# Altium PCB AX301_AX4010.PcbDoc (part 2 of 10)
Units mm, origin at the board's own origin, x right, y up, seen from the top; angles counter-clockwise.
Board outline 131.7 x 91.8 mm, 4 copper layers (Top Layer, GND, Mid-Layer 1, Bottom Layer); 191 components, 338 nets, 1108 pads, 420 vias.
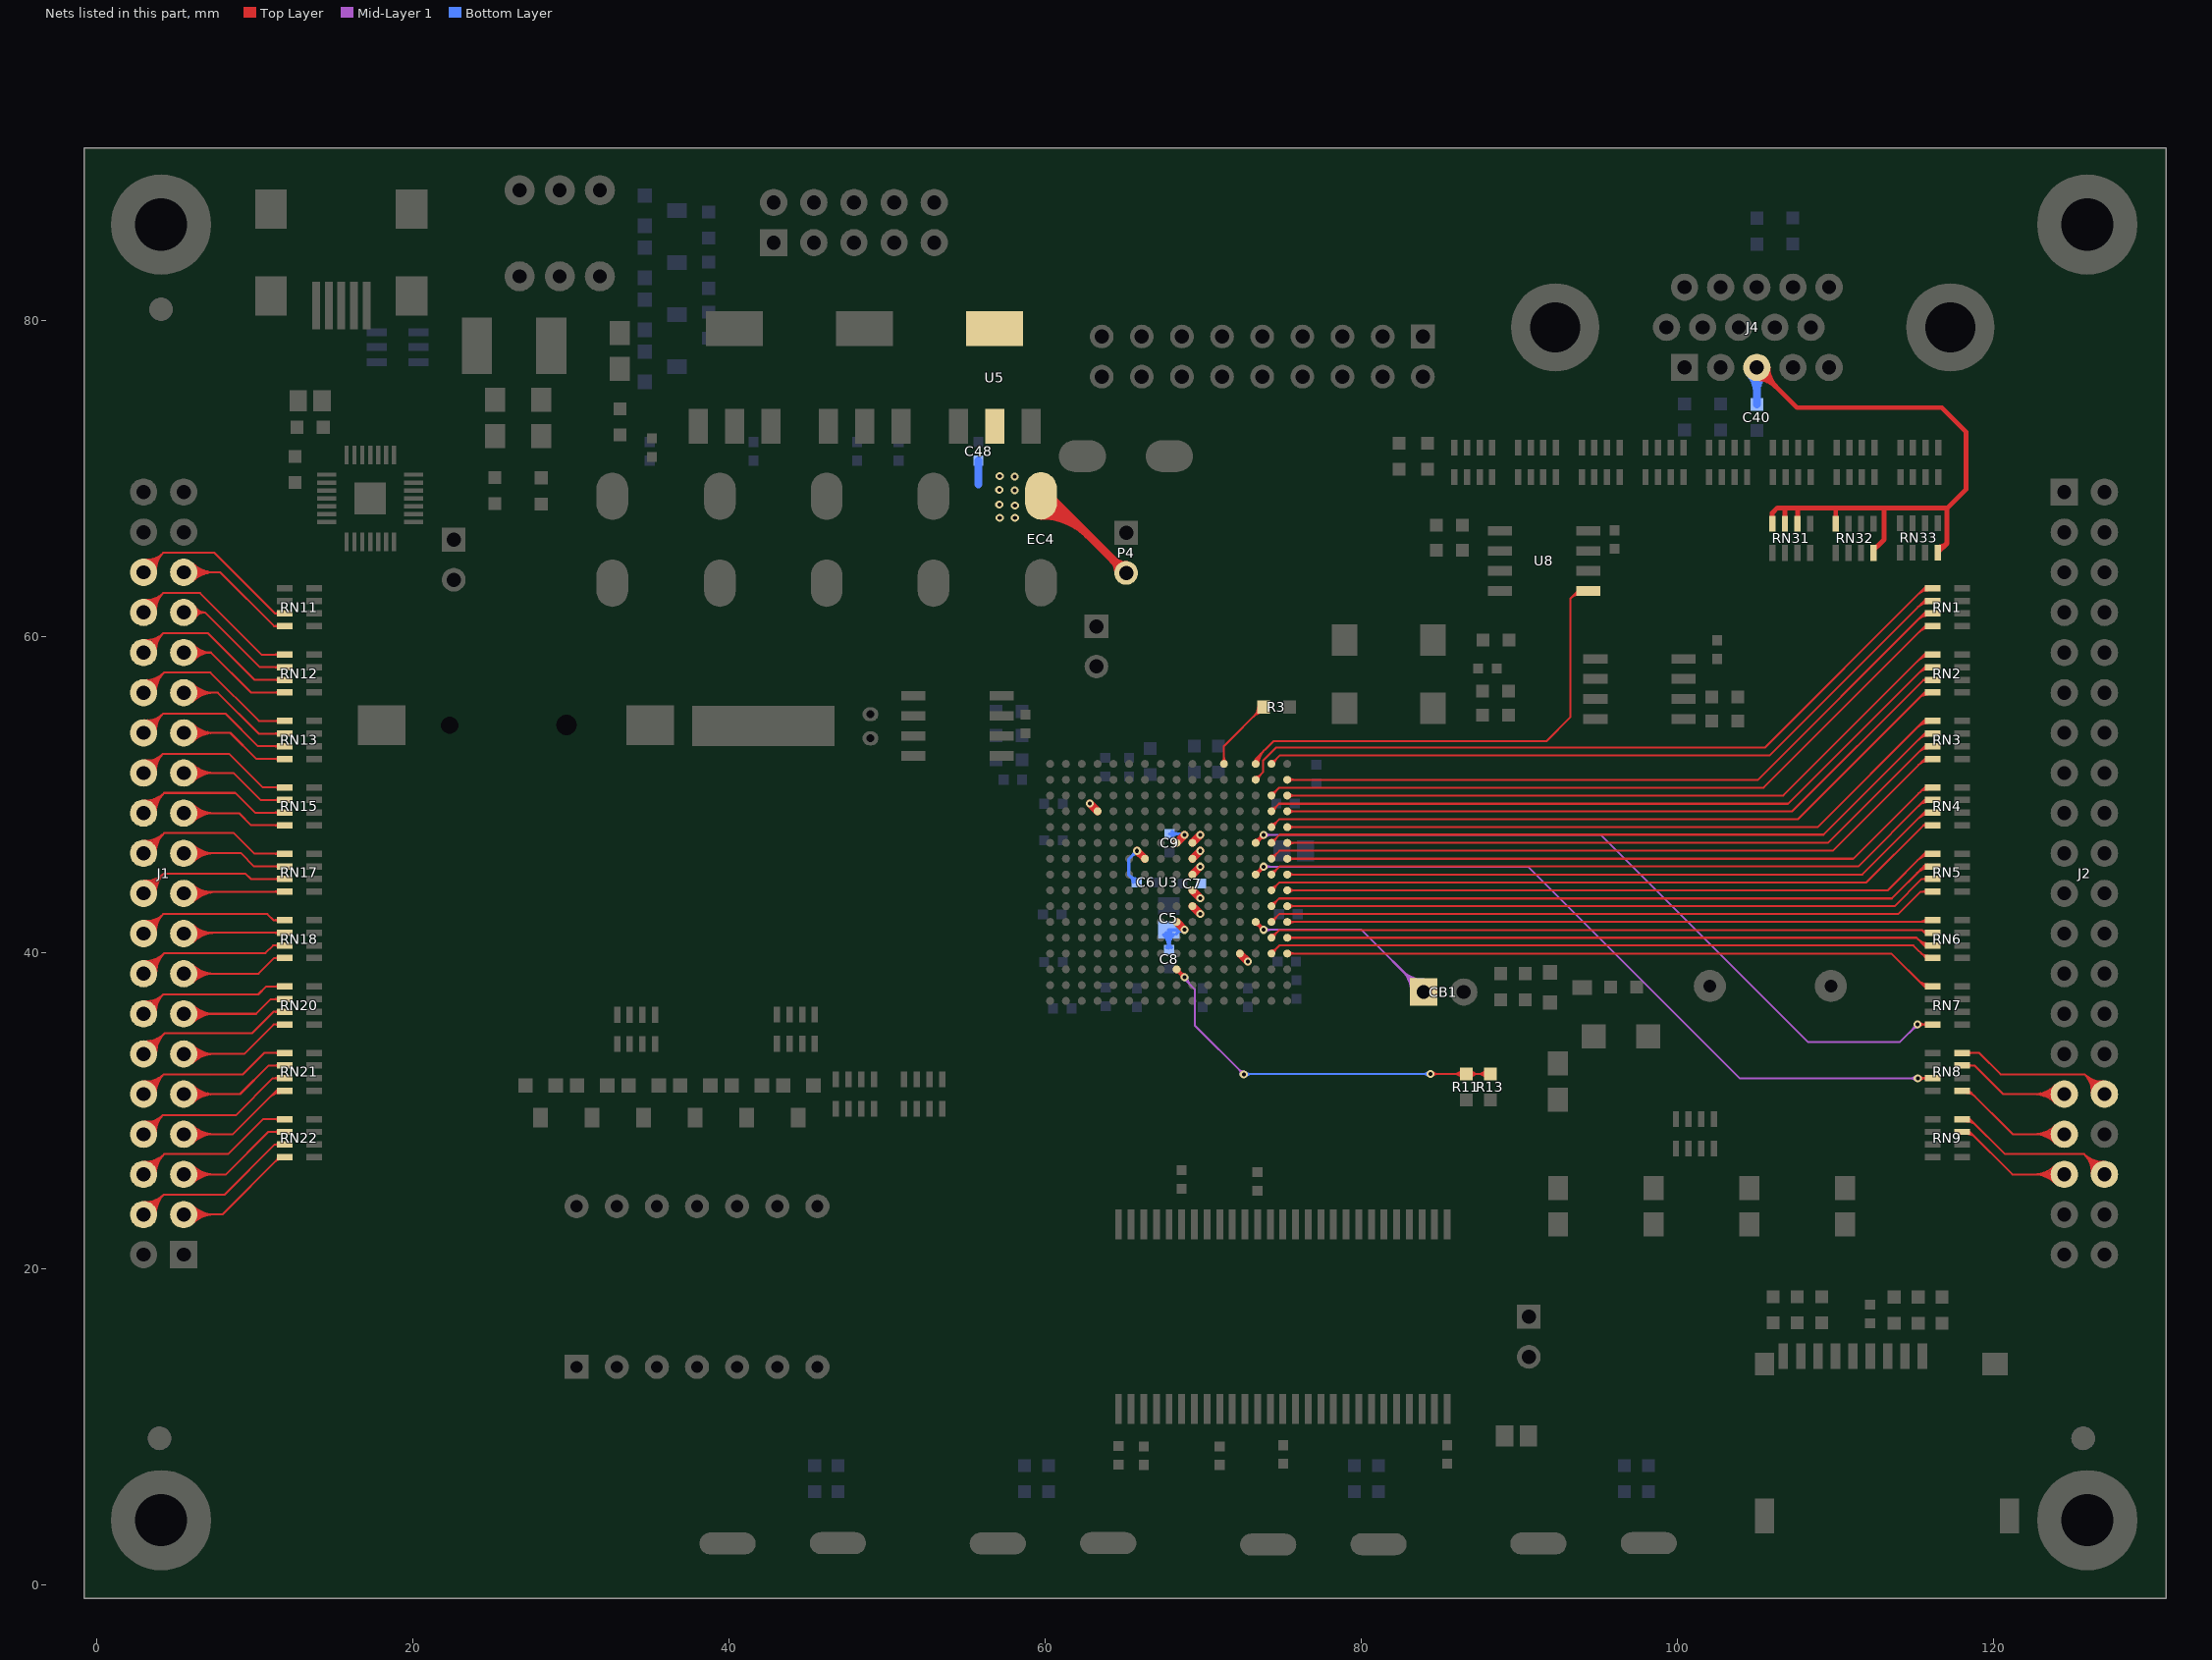
[diagram p4: the nets of this part, all layers, seen from the top]

## Via types
v1: diameter 0.508, hole 0.254, Top Layer to Bottom Layer, 377 vias
v2: diameter 0.762, hole 0.381, Top Layer to Bottom Layer, 41 vias
v3: diameter 1.016, hole 0.508, Top Layer to Bottom Layer, 2 vias

## Nets (pads, with @x,y where several pads share a name; then routed paths per layer and width w, separated by ;. In a path a pad name is that pad's centre, name@x,y a point inside that pad or via, vN(x,y) a via of type N, cw(c..) or ccw(c..) an arc to the next point about the centre after c; other vN are vias at no path point) (continued)
_D8: J2.33 RN8.5 | length 17.7
  Top Layer w0.127: RN8.5@118.012,31.239 118.468,31.239 121.218,28.49 J2.33@124.485,28.49 ; RN8.5@118.312,31.103 cw(c118.312,30.396) 118.812,30.896 ; RN8.5@118.312,31.23 cw(c118.312,30.829) 118.595,31.112 ; J2.33@123.92,27.924 ccw(c122.554,26.558) 122.554,28.49 ccw(c122.554,30.422) J2.33@123.92,29.056 ; J2.33@124.009,28.014 ccw(c122.86,26.865) 122.86,28.49 ccw(c122.86,30.115) J2.33@124.009,28.966 ; J2.33@124.099,28.104 ccw(c123.167,27.172) 123.167,28.49 ccw(c123.167,29.808) J2.33@124.099,28.876 ; J2.33@124.189,28.194 ccw(c123.474,27.478) 123.474,28.49 ccw(c123.474,29.502) J2.33@124.189,28.786
_E7: J2.32 RN8.8 | length 18.7
  Top Layer w0.127: RN8.8@118.012,33.639 119.091,33.639 120.447,32.283 125.772,32.283 ; RN8.8@118.409,33.543 cw(c118.642,33.31) 118.642,33.639 cw(c118.642,33.969) RN8.8@118.409,33.736 ; J2.32@126.227,31.08 ccw(c124.667,31.178) 125.772,32.283 ; J2.32@126.354,31.072 ccw(c125.041,31.154) 125.971,32.084 ccw(c126.901,33.014) J2.32@126.983,31.702 ; J2.32@126.48,31.064 ccw(c125.415,31.131) 126.17,31.885 ccw(c126.924,32.64) J2.32@126.991,31.575 ; J2.32@126.607,31.056 ccw(c125.79,31.107) 126.369,31.687 ccw(c126.948,32.266) J2.32@126.999,31.448 ; J2.32@126.975,31.829 cw(c126.877,33.389) 125.772,32.283 ; J2.32@127.025,31.03 125.772,32.283
_E8: J2.36 RN9.8 | length 20.1
  Top Layer w0.127: RN9.8@118.012,29.439 118.516,29.439 ; RN9.8@118.312,29.302 cw(c118.312,28.48) 118.894,29.061 ; RN9.8@118.312,29.429 cw(c118.312,28.913) 118.677,29.278 ; RN9.8@118.438,29.386 cw(c118.516,29.354) 118.516,29.439 ; RN9.8@118.438,29.491 ccw(c118.516,29.523) 118.516,29.439 ; J2.36@126.226,25.988 ccw(c124.584,26.066) 125.747,27.229 ; J2.36@126.353,25.982 ccw(c124.972,26.048) 125.95,27.026 ccw(c126.927,28.004) J2.36@126.993,26.622 ; J2.36@126.48,25.976 ccw(c125.359,26.03) 126.153,26.823 ccw(c126.946,27.616) J2.36@126.999,26.495 ; J2.36@126.607,25.97 ccw(c125.747,26.011) 126.356,26.62 ccw(c126.964,27.229) J2.36@127.005,26.369 ; J2.36@126.987,26.749 cw(c126.909,28.391) 125.747,27.229 ; J2.36@127.025,25.95 125.747,27.229 ; 118.516,29.439 120.726,27.229 125.747,27.229
_E9: J2.35 RN9.7 | length 17.8
  Top Layer w0.127: RN9.7@118.012,28.639 118.504,28.639 121.192,25.95 J2.35@124.485,25.95 ; RN9.7@118.312,28.502 cw(c118.312,27.711) 118.872,28.27 ; RN9.7@118.312,28.629 cw(c118.312,28.144) 118.655,28.487 ; J2.35@123.92,25.384 ccw(c122.554,24.018) 122.554,25.95 ccw(c122.554,27.882) J2.35@123.92,26.516 ; J2.35@124.009,25.474 ccw(c122.86,24.325) 122.86,25.95 ccw(c122.86,27.575) J2.35@124.009,26.426 ; J2.35@124.099,25.564 ccw(c123.167,24.632) 123.167,25.95 ccw(c123.167,27.268) J2.35@124.099,26.336 ; J2.35@124.189,25.654 ccw(c123.474,24.938) 123.474,25.95 ccw(c123.474,26.962) J2.35@124.189,26.246
_F8: J2.31 RN8.7 | length 17
  Top Layer w0.127: RN8.7@118.012,32.839 118.799,32.839 120.608,31.03 J2.31@124.485,31.03 ; RN8.7@118.409,32.743 cw(c118.642,32.51) 118.642,32.839 cw(c118.642,33.169) RN8.7@118.409,32.936 ; J2.31@123.92,30.464 ccw(c122.554,29.098) 122.554,31.03 ccw(c122.554,32.962) J2.31@123.92,31.596 ; J2.31@124.009,30.554 ccw(c122.86,29.405) 122.86,31.03 ccw(c122.86,32.655) J2.31@124.009,31.506 ; J2.31@124.099,30.644 ccw(c123.167,29.712) 123.167,31.03 ccw(c123.167,32.348) J2.31@124.099,31.416 ; J2.31@124.189,30.734 ccw(c123.474,30.018) 123.474,31.03 ccw(c123.474,32.042) J2.31@124.189,31.326
_K9: J1.31 RN12.4 | length 15.7
  Top Layer w0.127: J1.31@5.512,58.97 7.222,58.97 ; J1.31@5.815,58.699 cw(c6.4,58.203) 6.4,58.97 cw(c6.4,59.737) J1.31@5.815,59.241 ; J1.31@5.912,58.617 cw(c6.674,57.971) 6.674,58.97 cw(c6.674,59.969) J1.31@5.912,59.323 ; J1.31@6.009,58.535 cw(c6.948,57.738) 6.948,58.97 cw(c6.948,60.202) J1.31@6.009,59.405 ; J1.31@6.106,59.487 ccw(c7.222,60.434) 7.222,58.97 ; J1.31@6.106,58.453 cw(c7.222,57.506) 7.222,58.97 ; RN12.4@11.491,56.346 ccw(c11.258,56.113) 11.258,56.442 ccw(c11.258,56.772) RN12.4@11.491,56.539 ; RN12.4@11.887,56.442 9.75,56.442 7.222,58.97
_L9: J1.30 RN13.1 | length 19.7
  Top Layer w0.127: J1.30@2.972,56.43 4.251,57.709 ; J1.30@2.978,56.848 ccw(c3.025,57.726) 3.647,57.105 ; J1.30@2.985,56.975 ccw(c3.045,58.109) 3.848,57.306 ; J1.30@2.991,57.102 ccw(c3.066,58.491) 4.049,57.507 ; J1.30@2.998,57.229 ccw(c3.086,58.873) 4.251,57.709 ; J1.30@3.374,56.443 cw(c4.244,56.471) 3.629,57.087 ; J1.30@3.501,56.448 cw(c4.646,56.484) 3.836,57.294 ; J1.30@3.628,56.452 cw(c5.047,56.497) 4.043,57.501 ; J1.30@3.755,56.456 cw(c5.449,56.51) 4.251,57.709 ; RN13.1@11.491,54.545 ccw(c11.258,54.312) 11.258,54.642 ccw(c11.258,54.971) RN13.1@11.491,54.738 ; RN13.1@11.887,54.642 10.255,54.642 7.188,57.709 4.251,57.709
_L10: J1.29 RN13.2 | length 17.2
  Top Layer w0.127: J1.29@5.512,56.43 7.654,56.43 10.242,53.842 RN13.2@11.887,53.842 ; J1.29@5.792,56.134 cw(c6.507,55.418) 6.507,56.43 cw(c6.507,57.442) J1.29@5.792,56.726 ; J1.29@5.881,56.044 cw(c6.814,55.112) 6.814,56.43 cw(c6.814,57.748) J1.29@5.881,56.816 ; J1.29@5.971,55.954 cw(c7.12,54.805) 7.12,56.43 cw(c7.12,58.055) J1.29@5.971,56.906 ; J1.29@6.061,55.864 cw(c7.427,54.498) 7.427,56.43 cw(c7.427,58.362) J1.29@6.061,56.996 ; RN13.2@11.491,53.745 ccw(c11.258,53.512) 11.258,53.842 ccw(c11.258,54.171) RN13.2@11.491,53.938
_M9: J1.28 RN13.3 | length 18.7
  Top Layer w0.127: J1.28@2.972,53.89 4.2,55.118 ; J1.28@2.99,54.308 ccw(c3.057,55.1) 3.62,54.538 ; J1.28@3.001,54.434 ccw(c3.087,55.457) 3.813,54.731 ; J1.28@3.012,54.561 ccw(c3.117,55.814) 4.006,54.925 ; J1.28@3.022,54.687 ccw(c3.147,56.17) 4.2,55.118 ; J1.28@3.373,53.916 cw(c4.158,53.964) 3.602,54.52 ; J1.28@3.5,53.924 cw(c4.533,53.988) 3.801,54.72 ; J1.28@3.627,53.932 cw(c4.908,54.011) 4.001,54.919 ; J1.28@3.754,53.939 cw(c5.284,54.034) 4.2,55.118 ; RN13.3@11.491,52.945 ccw(c11.258,52.712) 11.258,53.042 ccw(c11.258,53.371) RN13.3@11.491,53.138 ; RN13.3@11.887,53.042 10.204,53.042 8.128,55.118 4.2,55.118
_N2: J1.36 RN11.3 | length 19.4
  Top Layer w0.127: J1.36@2.972,64.05 4.2,65.278 ; J1.36@2.99,64.468 ccw(c3.057,65.26) 3.62,64.698 ; J1.36@3.001,64.594 ccw(c3.087,65.617) 3.813,64.891 ; J1.36@3.012,64.721 ccw(c3.117,65.974) 4.006,65.085 ; J1.36@3.022,64.847 ccw(c3.147,66.33) 4.2,65.278 ; J1.36@3.373,64.076 cw(c4.158,64.124) 3.602,64.68 ; J1.36@3.5,64.084 cw(c4.533,64.148) 3.801,64.88 ; J1.36@3.627,64.092 cw(c4.908,64.171) 4.001,65.079 ; J1.36@3.754,64.099 cw(c5.284,64.194) 4.2,65.278 ; RN11.3@11.486,61.351 ccw(c11.277,61.16) 11.277,61.443 ; RN11.3@11.486,61.535 cw(c11.277,61.726) 11.277,61.443 ; RN11.3@11.887,61.443 11.277,61.443 ; 4.2,65.278 7.442,65.278 11.277,61.443
_P1: J1.35 RN11.4 | length 17.6
  Top Layer w0.127: J1.35@5.512,64.05 7.807,64.05 11.214,60.643 RN11.4@11.887,60.643 ; J1.35@5.792,63.754 cw(c6.507,63.038) 6.507,64.05 cw(c6.507,65.062) J1.35@5.792,64.346 ; J1.35@5.881,63.664 cw(c6.814,62.732) 6.814,64.05 cw(c6.814,65.368) J1.35@5.881,64.436 ; J1.35@5.971,63.574 cw(c7.12,62.425) 7.12,64.05 cw(c7.12,65.675) J1.35@5.971,64.526 ; J1.35@6.061,63.484 cw(c7.427,62.118) 7.427,64.05 cw(c7.427,65.982) J1.35@6.061,64.616 ; RN11.4@11.491,60.546 ccw(c11.258,60.313) 11.258,60.643 ccw(c11.258,60.972) RN11.4@11.491,60.739
_P2: J1.34 RN12.1 | length 19.5
  Top Layer w0.127: J1.34@2.972,61.51 4.2,62.738 ; J1.34@2.99,61.928 ccw(c3.057,62.72) 3.62,62.158 ; J1.34@3.001,62.054 ccw(c3.087,63.077) 3.813,62.351 ; J1.34@3.012,62.181 ccw(c3.117,63.434) 4.006,62.545 ; J1.34@3.022,62.307 ccw(c3.147,63.79) 4.2,62.738 ; J1.34@3.373,61.536 cw(c4.158,61.584) 3.602,62.14 ; J1.34@3.5,61.544 cw(c4.533,61.608) 3.801,62.34 ; J1.34@3.627,61.552 cw(c4.908,61.631) 4.001,62.539 ; J1.34@3.754,61.559 cw(c5.284,61.654) 4.2,62.738 ; RN12.1@11.491,58.746 ccw(c11.258,58.513) 11.258,58.842 ccw(c11.258,59.172) RN12.1@11.491,58.939 ; RN12.1@11.887,58.842 10.424,58.842 6.528,62.738 4.2,62.738
_P3: J1.26 RN15.1 | length 18.4
  Top Layer w0.127: J1.26@2.972,51.35 4.174,52.553 ; J1.26@2.997,51.767 ccw(c3.072,52.518) 3.606,51.984 ; J1.26@3.01,51.893 ccw(c3.107,52.862) 3.796,52.174 ; J1.26@3.022,52.02 ccw(c3.141,53.207) 3.985,52.363 ; J1.26@3.035,52.146 ccw(c3.176,53.551) 4.174,52.553 ; J1.26@3.373,51.382 cw(c4.116,51.44) 3.589,51.967 ; J1.26@3.5,51.392 cw(c4.478,51.468) 3.784,52.162 ; J1.26@3.626,51.402 cw(c4.84,51.496) 3.979,52.357 ; J1.26@3.753,51.412 cw(c5.202,51.525) 4.174,52.553 ; RN15.1@11.491,50.345 ccw(c11.258,50.112) 11.258,50.441 ccw(c11.258,50.771) RN15.1@11.491,50.538 ; RN15.1@11.887,50.441 10.493,50.441 8.382,52.553 4.174,52.553
_P8: J1.32 RN12.3 | length 19.1
  Top Layer w0.127: J1.32@2.972,58.97 4.2,60.198 ; J1.32@2.99,59.388 ccw(c3.057,60.18) 3.62,59.618 ; J1.32@3.001,59.514 ccw(c3.087,60.537) 3.813,59.811 ; J1.32@3.012,59.641 ccw(c3.117,60.894) 4.006,60.005 ; J1.32@3.022,59.767 ccw(c3.147,61.25) 4.2,60.198 ; J1.32@3.373,58.996 cw(c4.158,59.044) 3.602,59.6 ; J1.32@3.5,59.004 cw(c4.533,59.068) 3.801,59.8 ; J1.32@3.627,59.012 cw(c4.908,59.091) 4.001,59.999 ; J1.32@3.754,59.019 cw(c5.284,59.114) 4.2,60.198 ; RN12.3@11.491,57.146 ccw(c11.258,56.913) 11.258,57.242 ccw(c11.258,57.572) RN12.3@11.491,57.339 ; RN12.3@11.887,57.242 9.992,57.242 7.036,60.198 4.2,60.198
_R1: J1.33 RN12.2 | length 12.3
  Top Layer w0.127: J1.33@5.512,61.51 6.841,61.51 ; J1.33@5.975,61.249 cw(c6.414,61.01) 6.414,61.51 cw(c6.414,62.01) J1.33@5.975,61.771 ; J1.33@6.086,61.188 cw(c6.628,60.894) 6.628,61.51 cw(c6.628,62.126) J1.33@6.086,61.832 ; J1.33@6.198,61.128 cw(c6.841,60.778) 6.841,61.51 ; J1.33@6.198,61.892 ccw(c6.841,62.242) 6.841,61.51 ; RN12.2@11.491,57.946 ccw(c11.258,57.713) 11.258,58.042 ccw(c11.258,58.372) RN12.2@11.491,58.139 ; RN12.2@11.887,58.042 10.309,58.042 6.841,61.51
_R3: J1.24 RN15.3 | length 18.9
  Top Layer w0.127: J1.24@2.972,48.81 4.251,50.089 ; J1.24@2.978,49.228 ccw(c3.025,50.106) 3.647,49.485 ; J1.24@2.985,49.355 ccw(c3.045,50.489) 3.848,49.686 ; J1.24@2.991,49.482 ccw(c3.066,50.871) 4.049,49.887 ; J1.24@2.998,49.609 ccw(c3.086,51.253) 4.251,50.089 ; J1.24@3.374,48.823 cw(c4.244,48.851) 3.629,49.467 ; J1.24@3.501,48.828 cw(c4.646,48.864) 3.836,49.674 ; J1.24@3.628,48.832 cw(c5.047,48.877) 4.043,49.881 ; J1.24@3.755,48.836 cw(c5.449,48.89) 4.251,50.089 ; RN15.3@11.491,48.745 ccw(c11.258,48.512) 11.258,48.841 ccw(c11.258,49.171) RN15.3@11.491,48.938 ; RN15.3@11.887,48.841 10.011,48.841 8.763,50.089 4.251,50.089
_R4: J1.22 RN17.1 | length 18.9
  Top Layer w0.127: J1.22@2.972,46.27 4.251,47.549 ; J1.22@2.978,46.688 ccw(c3.025,47.566) 3.647,46.945 ; J1.22@2.985,46.815 ccw(c3.045,47.949) 3.848,47.146 ; J1.22@2.991,46.942 ccw(c3.066,48.331) 4.049,47.347 ; J1.22@2.998,47.069 ccw(c3.086,48.713) 4.251,47.549 ; J1.22@3.374,46.283 cw(c4.244,46.311) 3.629,46.927 ; J1.22@3.501,46.288 cw(c4.646,46.324) 3.836,47.134 ; J1.22@3.628,46.292 cw(c5.047,46.337) 4.043,47.341 ; J1.22@3.755,46.296 cw(c5.449,46.35) 4.251,47.549 ; RN17.1@11.491,46.144 ccw(c11.258,45.911) 11.258,46.241 ccw(c11.258,46.57) RN17.1@11.491,46.337 ; RN17.1@11.887,46.241 9.97,46.241 8.661,47.549 4.251,47.549
_R5: J1.20 RN17.3 | length 18.3
  Top Layer w0.127: J1.20@2.972,43.73 4.225,44.983 ; J1.20@2.984,44.148 ccw(c3.041,44.983) 3.633,44.391 ; J1.20@2.993,44.275 ccw(c3.067,45.352) 3.83,44.589 ; J1.20@3.001,44.402 ccw(c3.092,45.722) 4.028,44.786 ; J1.20@3.01,44.528 ccw(c3.117,46.091) 4.225,44.983 ; J1.20@3.374,43.75 cw(c4.201,43.788) 3.615,44.374 ; J1.20@3.501,43.755 cw(c4.589,43.806) 3.819,44.577 ; J1.20@3.628,43.761 cw(c4.977,43.825) 4.022,44.78 ; J1.20@3.754,43.767 cw(c5.366,43.843) 4.225,44.983 ; RN17.3@11.491,44.544 ccw(c11.258,44.311) 11.258,44.641 ccw(c11.258,44.97) RN17.3@11.491,44.737 ; RN17.3@11.887,44.641 9.741,44.641 9.398,44.983 4.225,44.983
_R6: J1.18 RN18.1 | length 18
  Top Layer w0.127: J1.18@2.972,41.19 4.2,42.418 ; J1.18@2.99,41.608 ccw(c3.057,42.4) 3.62,41.838 ; J1.18@3.001,41.734 ccw(c3.087,42.757) 3.813,42.031 ; J1.18@3.012,41.861 ccw(c3.117,43.114) 4.006,42.225 ; J1.18@3.022,41.987 ccw(c3.147,43.47) 4.2,42.418 ; J1.18@3.373,41.216 cw(c4.158,41.264) 3.602,41.82 ; J1.18@3.5,41.224 cw(c4.533,41.288) 3.801,42.02 ; J1.18@3.627,41.232 cw(c4.908,41.311) 4.001,42.219 ; J1.18@3.754,41.239 cw(c5.284,41.334) 4.2,42.418 ; RN18.1@11.491,41.944 ccw(c11.258,41.711) 11.258,42.04 ccw(c11.258,42.37) RN18.1@11.491,42.137 ; RN18.1@11.887,42.04 11.173,42.04 10.795,42.418 4.2,42.418
_R7: J1.16 RN18.3 | length 18.9
  Top Layer w0.127: J1.16@2.972,38.65 4.276,39.954 ; J1.16@2.972,39.069 ccw(c3.008,39.99) 3.66,39.338 ; J1.16@2.977,39.196 ccw(c3.023,40.385) 3.865,39.544 ; J1.16@2.982,39.323 ccw(c3.039,40.781) 4.071,39.749 ; J1.16@2.987,39.449 ccw(c3.054,41.176) 4.276,39.954 ; J1.16@3.374,38.657 cw(c4.288,38.674) 3.642,39.32 ; J1.16@3.501,38.66 cw(c4.703,38.681) 3.853,39.531 ; J1.16@3.628,38.662 cw(c5.118,38.689) 4.065,39.743 ; J1.16@3.755,38.664 cw(c5.534,38.696) 4.276,39.954 ; RN18.3@11.491,40.344 ccw(c11.258,40.111) 11.258,40.44 ccw(c11.258,40.77) RN18.3@11.491,40.537 ; RN18.3@11.887,40.44 11.154,40.44 10.668,39.954 4.276,39.954
_R8: J1.14 RN20.1 | length 18.1
  Top Layer w0.127: J1.14@2.972,36.11 4.2,37.338 ; J1.14@2.99,36.528 ccw(c3.057,37.32) 3.62,36.758 ; J1.14@3.001,36.654 ccw(c3.087,37.677) 3.813,36.951 ; J1.14@3.012,36.781 ccw(c3.117,38.034) 4.006,37.145 ; J1.14@3.022,36.907 ccw(c3.147,38.39) 4.2,37.338 ; J1.14@3.373,36.136 cw(c4.158,36.184) 3.602,36.74 ; J1.14@3.5,36.144 cw(c4.533,36.208) 3.801,36.94 ; J1.14@3.627,36.152 cw(c4.908,36.231) 4.001,37.139 ; J1.14@3.754,36.159 cw(c5.284,36.254) 4.2,37.338 ; RN20.1@11.491,37.743 ccw(c11.258,37.51) 11.258,37.84 ccw(c11.258,38.169) RN20.1@11.491,37.936 ; RN20.1@11.887,37.84 10.712,37.84 10.211,37.338 4.2,37.338
_R9: J1.12 RN20.3 | length 19.2
  Top Layer w0.127: J1.12@2.972,33.57 4.276,34.874 ; J1.12@2.972,33.989 ccw(c3.008,34.91) 3.66,34.258 ; J1.12@2.977,34.116 ccw(c3.023,35.305) 3.865,34.464 ; J1.12@2.982,34.243 ccw(c3.039,35.701) 4.071,34.669 ; J1.12@2.987,34.369 ccw(c3.054,36.096) 4.276,34.874 ; J1.12@3.374,33.577 cw(c4.288,33.594) 3.642,34.24 ; J1.12@3.501,33.58 cw(c4.703,33.601) 3.853,34.451 ; J1.12@3.628,33.582 cw(c5.118,33.609) 4.065,34.663 ; J1.12@3.755,33.584 cw(c5.534,33.616) 4.276,34.874 ; RN20.3@11.491,36.143 ccw(c11.258,35.91) 11.258,36.24 ccw(c11.258,36.569) RN20.3@11.491,36.336 ; RN20.3@11.887,36.24 11.17,36.24 9.804,34.874 4.276,34.874
_R10: J1.10 RN21.1 | length 18.7
  Top Layer w0.127: J1.10@2.972,31.03 4.225,32.283 ; J1.10@2.984,31.448 ccw(c3.041,32.283) 3.633,31.691 ; J1.10@2.993,31.575 ccw(c3.067,32.652) 3.83,31.889 ; J1.10@3.001,31.702 ccw(c3.092,33.022) 4.028,32.086 ; J1.10@3.01,31.828 ccw(c3.117,33.391) 4.225,32.283 ; J1.10@3.374,31.05 cw(c4.201,31.088) 3.615,31.674 ; J1.10@3.501,31.055 cw(c4.589,31.106) 3.819,31.877 ; J1.10@3.628,31.061 cw(c4.977,31.125) 4.022,32.08 ; J1.10@3.754,31.067 cw(c5.366,31.143) 4.225,32.283 ; RN21.1@11.491,33.543 ccw(c11.258,33.31) 11.258,33.639 ccw(c11.258,33.969) RN21.1@11.491,33.736 ; RN21.1@11.887,33.639 10.601,33.639 9.246,32.283 4.225,32.283
_R11: J1.8 RN21.3 | length 18.5
  Top Layer w0.127: J1.8@2.972,28.49 4.174,29.693 ; J1.8@2.997,28.907 ccw(c3.072,29.658) 3.606,29.124 ; J1.8@3.01,29.033 ccw(c3.107,30.002) 3.796,29.314 ; J1.8@3.022,29.16 ccw(c3.141,30.347) 3.985,29.503 ; J1.8@3.035,29.286 ccw(c3.176,30.691) 4.174,29.693 ; J1.8@3.373,28.522 cw(c4.116,28.58) 3.589,29.107 ; J1.8@3.5,28.532 cw(c4.478,28.608) 3.784,29.302 ; J1.8@3.626,28.542 cw(c4.84,28.636) 3.979,29.497 ; J1.8@3.753,28.552 cw(c5.202,28.665) 4.174,29.693 ; RN21.3@11.491,31.943 ccw(c11.258,31.71) 11.258,32.039 ccw(c11.258,32.369) RN21.3@11.491,32.136 ; RN21.3@11.887,32.039 11.135,32.039 8.788,29.693 4.174,29.693
_R12: J1.6 RN22.1 | length 19.3
  Top Layer w0.127: J1.6@2.972,25.95 4.251,27.229 ; J1.6@2.978,26.368 ccw(c3.025,27.246) 3.647,26.625 ; J1.6@2.985,26.495 ccw(c3.045,27.629) 3.848,26.826 ; J1.6@2.991,26.622 ccw(c3.066,28.011) 4.049,27.027 ; J1.6@2.998,26.749 ccw(c3.086,28.393) 4.251,27.229 ; J1.6@3.374,25.963 cw(c4.244,25.991) 3.629,26.607 ; J1.6@3.501,25.968 cw(c4.646,26.004) 3.836,26.814 ; J1.6@3.628,25.972 cw(c5.047,26.017) 4.043,27.021 ; J1.6@3.755,25.976 cw(c5.449,26.03) 4.251,27.229 ; RN22.1@11.491,29.342 ccw(c11.258,29.109) 11.258,29.439 ccw(c11.258,29.768) RN22.1@11.491,29.535 ; RN22.1@11.887,29.439 10.516,29.439 8.306,27.229 4.251,27.229
_R13: J1.4 RN22.3 | length 19.4
  Top Layer w0.127: J1.4@2.972,23.41 4.225,24.663 ; J1.4@2.984,23.828 ccw(c3.041,24.663) 3.633,24.071 ; J1.4@2.993,23.955 ccw(c3.067,25.032) 3.83,24.269 ; J1.4@3.001,24.082 ccw(c3.092,25.402) 4.028,24.466 ; J1.4@3.01,24.208 ccw(c3.117,25.771) 4.225,24.663 ; J1.4@3.374,23.43 cw(c4.201,23.468) 3.615,24.054 ; J1.4@3.501,23.435 cw(c4.589,23.486) 3.819,24.257 ; J1.4@3.628,23.441 cw(c4.977,23.505) 4.022,24.46 ; J1.4@3.754,23.447 cw(c5.366,23.523) 4.225,24.663 ; RN22.3@11.491,27.742 ccw(c11.258,27.509) 11.258,27.839 ccw(c11.258,28.168) RN22.3@11.491,27.935 ; RN22.3@11.887,27.839 11.252,27.839 8.077,24.663 4.225,24.663
_T2: J1.27 RN13.4 | length 16.8
  Top Layer w0.127: J1.27@5.512,53.89 8.442,53.89 10.09,52.242 RN13.4@11.887,52.242 ; J1.27@5.792,53.594 cw(c6.507,52.878) 6.507,53.89 cw(c6.507,54.902) J1.27@5.792,54.186 ; J1.27@5.881,53.504 cw(c6.814,52.572) 6.814,53.89 cw(c6.814,55.208) J1.27@5.881,54.276 ; J1.27@5.971,53.414 cw(c7.12,52.265) 7.12,53.89 cw(c7.12,55.515) J1.27@5.971,54.366 ; J1.27@6.061,53.324 cw(c7.427,51.958) 7.427,53.89 cw(c7.427,55.822) J1.27@6.061,54.456 ; RN13.4@11.491,52.145 ccw(c11.258,51.912) 11.258,52.242 ccw(c11.258,52.571) RN13.4@11.491,52.338
_T3: J1.25 RN15.2 | length 16.8
  Top Layer w0.127: J1.25@5.512,51.35 8.645,51.35 10.354,49.641 RN15.2@11.887,49.641 ; J1.25@5.792,51.054 cw(c6.507,50.338) 6.507,51.35 cw(c6.507,52.362) J1.25@5.792,51.646 ; J1.25@5.881,50.964 cw(c6.814,50.032) 6.814,51.35 cw(c6.814,52.668) J1.25@5.881,51.736 ; J1.25@5.971,50.874 cw(c7.12,49.725) 7.12,51.35 cw(c7.12,52.975) J1.25@5.971,51.826 ; J1.25@6.061,50.784 cw(c7.427,49.418) 7.427,51.35 cw(c7.427,53.282) J1.25@6.061,51.916 ; RN15.2@11.491,49.545 ccw(c11.258,49.312) 11.258,49.641 ccw(c11.258,49.971) RN15.2@11.491,49.738
_T4: J1.23 RN15.4 | length 16.5
  Top Layer w0.127: J1.23@5.512,48.81 9,48.81 9.769,48.041 RN15.4@11.887,48.041 ; J1.23@5.792,48.514 cw(c6.507,47.798) 6.507,48.81 cw(c6.507,49.822) J1.23@5.792,49.106 ; J1.23@5.881,48.424 cw(c6.814,47.492) 6.814,48.81 cw(c6.814,50.128) J1.23@5.881,49.196 ; J1.23@5.971,48.334 cw(c7.12,47.185) 7.12,48.81 cw(c7.12,50.435) J1.23@5.971,49.286 ; J1.23@6.061,48.244 cw(c7.427,46.878) 7.427,48.81 cw(c7.427,50.742) J1.23@6.061,49.376 ; RN15.4@11.491,47.945 ccw(c11.258,47.712) 11.258,48.041 ccw(c11.258,48.371) RN15.4@11.491,48.138
_T5: J1.21 RN17.2 | length 16.5
  Top Layer w0.127: J1.21@5.512,46.27 9.127,46.27 9.957,45.441 RN17.2@11.887,45.441 ; J1.21@5.792,45.974 cw(c6.507,45.258) 6.507,46.27 cw(c6.507,47.282) J1.21@5.792,46.566 ; J1.21@5.881,45.884 cw(c6.814,44.952) 6.814,46.27 cw(c6.814,47.588) J1.21@5.881,46.656 ; J1.21@5.971,45.794 cw(c7.12,44.645) 7.12,46.27 cw(c7.12,47.895) J1.21@5.971,46.746 ; J1.21@6.061,45.704 cw(c7.427,44.338) 7.427,46.27 cw(c7.427,48.202) J1.21@6.061,46.836 ; RN17.2@11.491,45.344 ccw(c11.258,45.111) 11.258,45.441 ccw(c11.258,45.77) RN17.2@11.491,45.537
_T6: J1.19 RN17.4 | length 16.5
  Top Layer w0.127: J1.19@5.512,43.73 5.622,43.841 RN17.4@11.887,43.841 ; J1.19@5.702,43.523 cw(c6.468,42.758) 6.468,43.841 ; J1.19@5.792,43.434 cw(c6.774,42.451) 6.774,43.841 ; J1.19@5.881,43.344 cw(c7.081,42.144) 7.081,43.841 ; J1.19@5.881,44.116 ccw(c6.546,44.781) 6.546,43.841 ; J1.19@5.971,43.254 cw(c7.387,41.838) 7.387,43.841 ; J1.19@5.971,44.206 ccw(c6.853,45.088) 6.853,43.841 ; J1.19@6.061,43.164 cw(c7.694,41.531) 7.694,43.841 ; J1.19@6.061,44.296 ccw(c7.16,45.394) 7.16,43.841 ; RN17.4@11.491,43.744 ccw(c11.258,43.511) 11.258,43.841 ccw(c11.258,44.17) RN17.4@11.491,43.937
_T7: J1.17 RN18.2 | length 16.2
  Top Layer w0.127: J1.17@5.512,41.19 5.562,41.24 RN18.2@11.887,41.24 ; J1.17@5.792,40.894 cw(c6.628,40.057) 6.628,41.24 ; J1.17@5.792,41.486 ccw(c6.386,42.081) 6.386,41.24 ; J1.17@5.881,40.804 cw(c6.935,39.75) 6.935,41.24 ; J1.17@5.881,41.576 ccw(c6.692,42.387) 6.692,41.24 ; J1.17@5.971,40.714 cw(c7.241,39.444) 7.241,41.24 ; J1.17@5.971,41.666 ccw(c6.999,42.694) 6.999,41.24 ; J1.17@6.061,40.624 cw(c7.548,39.137) 7.548,41.24 ; J1.17@6.061,41.756 ccw(c7.306,43) 7.306,41.24 ; RN18.2@11.491,41.144 ccw(c11.258,40.911) 11.258,41.24 ccw(c11.258,41.57) RN18.2@11.491,41.337
_T8: J1.15 RN18.4 | length 16.6
  Top Layer w0.127: J1.15@5.512,38.65 10.227,38.65 11.218,39.64 RN18.4@11.887,39.64 ; J1.15@5.792,38.354 cw(c6.507,37.638) 6.507,38.65 cw(c6.507,39.662) J1.15@5.792,38.946 ; J1.15@5.881,38.264 cw(c6.814,37.332) 6.814,38.65 cw(c6.814,39.968) J1.15@5.881,39.036 ; J1.15@5.971,38.174 cw(c7.12,37.025) 7.12,38.65 cw(c7.12,40.275) J1.15@5.971,39.126 ; J1.15@6.061,38.084 cw(c7.427,36.718) 7.427,38.65 cw(c7.427,40.582) J1.15@6.061,39.216 ; RN18.4@11.491,39.544 ccw(c11.258,39.311) 11.258,39.64 ccw(c11.258,39.97) RN18.4@11.491,39.737
_T9: J1.13 RN20.2 | length 16.5
  Top Layer w0.127: J1.13@5.512,36.11 10.075,36.11 11.005,37.04 RN20.2@11.887,37.04 ; J1.13@5.792,35.814 cw(c6.507,35.098) 6.507,36.11 cw(c6.507,37.122) J1.13@5.792,36.406 ; J1.13@5.881,35.724 cw(c6.814,34.792) 6.814,36.11 cw(c6.814,37.428) J1.13@5.881,36.496 ; J1.13@5.971,35.634 cw(c7.12,34.485) 7.12,36.11 cw(c7.12,37.735) J1.13@5.971,36.586 ; J1.13@6.061,35.544 cw(c7.427,34.178) 7.427,36.11 cw(c7.427,38.042) J1.13@6.061,36.676 ; RN20.2@11.491,36.943 ccw(c11.258,36.71) 11.258,37.04 ccw(c11.258,37.369) RN20.2@11.491,37.136
_T10: J1.11 RN20.4 | length 16.9
  Top Layer w0.127: J1.11@5.512,33.57 9.313,33.57 11.183,35.44 RN20.4@11.887,35.44 ; J1.11@5.792,33.274 cw(c6.507,32.558) 6.507,33.57 cw(c6.507,34.582) J1.11@5.792,33.866 ; J1.11@5.881,33.184 cw(c6.814,32.252) 6.814,33.57 cw(c6.814,34.888) J1.11@5.881,33.956 ; J1.11@5.971,33.094 cw(c7.12,31.945) 7.12,33.57 cw(c7.12,35.195) J1.11@5.971,34.046 ; J1.11@6.061,33.004 cw(c7.427,31.638) 7.427,33.57 cw(c7.427,35.502) J1.11@6.061,34.136 ; RN20.4@11.491,35.343 ccw(c11.258,35.11) 11.258,35.44 ccw(c11.258,35.769) RN20.4@11.491,35.536
_T11: J1.9 RN21.2 | length 16.9
  Top Layer w0.127: J1.9@5.512,31.03 9.059,31.03 10.868,32.839 RN21.2@11.887,32.839 ; J1.9@5.792,30.734 cw(c6.507,30.018) 6.507,31.03 cw(c6.507,32.042) J1.9@5.792,31.326 ; J1.9@5.881,30.644 cw(c6.814,29.712) 6.814,31.03 cw(c6.814,32.348) J1.9@5.881,31.416 ; J1.9@5.971,30.554 cw(c7.12,29.405) 7.12,31.03 cw(c7.12,32.655) J1.9@5.971,31.506 ; J1.9@6.061,30.464 cw(c7.427,29.098) 7.427,31.03 cw(c7.427,32.962) J1.9@6.061,31.596 ; RN21.2@11.491,32.743 ccw(c11.258,32.51) 11.258,32.839 ccw(c11.258,33.169) RN21.2@11.491,32.936
_T12: J1.7 RN21.4 | length 18.4
  Top Layer w0.127: J1.7@5.512,28.49 8.602,28.49 11.351,31.239 ; J1.7@5.792,28.194 cw(c6.507,27.478) 6.507,28.49 cw(c6.507,29.502) J1.7@5.792,28.786 ; J1.7@5.881,28.104 cw(c6.814,27.172) 6.814,28.49 cw(c6.814,29.808) J1.7@5.881,28.876 ; J1.7@5.971,28.014 cw(c7.12,26.865) 7.12,28.49 cw(c7.12,30.115) J1.7@5.971,28.966 ; J1.7@6.061,27.924 cw(c7.427,26.558) 7.427,28.49 cw(c7.427,30.422) J1.7@6.061,29.056 ; 10.951,30.839 cw(c11.587,30.203) RN21.4@11.587,31.103 ; 11.168,31.056 cw(c11.587,30.636) RN21.4@11.587,31.23 ; 11.384,31.273 cw(c11.587,31.07) RN21.4@11.587,31.357 ; RN21.4@11.469,31.171 ccw(c11.351,31.103) 11.351,31.239 ; RN21.4@11.469,31.307 cw(c11.351,31.375) 11.351,31.239 ; RN21.4@11.887,31.239 11.351,31.239
_T13: J1.5 RN22.2 | length 17.3
  Top Layer w0.127: J1.5@5.512,25.95 8.17,25.95 10.859,28.639 RN22.2@11.887,28.639 ; J1.5@5.792,25.654 cw(c6.507,24.938) 6.507,25.95 cw(c6.507,26.962) J1.5@5.792,26.246 ; J1.5@5.881,25.564 cw(c6.814,24.632) 6.814,25.95 cw(c6.814,27.268) J1.5@5.881,26.336 ; J1.5@5.971,25.474 cw(c7.12,24.325) 7.12,25.95 cw(c7.12,27.575) J1.5@5.971,26.426 ; J1.5@6.061,25.384 cw(c7.427,24.018) 7.427,25.95 cw(c7.427,27.882) J1.5@6.061,26.516 ; RN22.2@11.491,28.542 ccw(c11.258,28.309) 11.258,28.639 ccw(c11.258,28.968) RN22.2@11.491,28.735
_T14: J1.3 RN22.4 | length 17.6
  Top Layer w0.127: J1.3@5.512,23.41 7.941,23.41 11.57,27.039 RN22.4@11.887,27.039 ; J1.3@5.792,23.114 cw(c6.507,22.398) 6.507,23.41 cw(c6.507,24.422) J1.3@5.792,23.706 ; J1.3@5.881,23.024 cw(c6.814,22.092) 6.814,23.41 cw(c6.814,24.728) J1.3@5.881,23.796 ; J1.3@5.971,22.934 cw(c7.12,21.785) 7.12,23.41 cw(c7.12,25.035) J1.3@5.971,23.886 ; J1.3@6.061,22.844 cw(c7.427,21.478) 7.427,23.41 cw(c7.427,25.342) J1.3@6.061,23.976 ; 11.325,26.793 cw(c11.587,26.531) RN22.4@11.587,26.902 ; 11.366,26.835 ccw(c11.163,27.039) RN22.4@11.451,27.039
A2: RN1.3 U3.A2 | length 47.6
  Top Layer w0.127: U3.A2@75.318,50.925 105.103,50.925 115.621,61.443 ; U3.A2@75.45,50.793 cw(c75.768,50.474) 75.768,50.925 cw(c75.768,51.375) U3.A2@75.45,51.056 ; 115.223,61.045 cw(c115.854,60.413) RN1.3@115.854,61.306 ; 115.44,61.262 cw(c115.854,60.847) RN1.3@115.854,61.433 ; RN1.3@115.656,61.478 cw(c115.854,61.28) RN1.3@115.854,61.56 ; RN1.3@115.735,61.376 ccw(c115.621,61.312) 115.621,61.443 ; RN1.3@115.735,61.51 cw(c115.621,61.574) 115.621,61.443 ; RN1.3@116.154,61.443 115.621,61.443
A3: RN2.1 U3.A3 | length 46.9
  Top Layer w0.127: U3.A3@75.318,49.925 106.703,49.925 115.621,58.842 ; U3.A3@75.45,49.793 cw(c75.768,49.474) 75.768,49.925 cw(c75.768,50.375) U3.A3@75.45,50.056 ; 115.223,58.444 cw(c115.854,57.813) RN2.1@115.854,58.706 ; 115.44,58.661 cw(c115.854,58.246) RN2.1@115.854,58.833 ; RN2.1@115.656,58.878 cw(c115.854,58.68) RN2.1@115.854,58.96 ; RN2.1@115.735,58.775 ccw(c115.621,58.711) 115.621,58.842 ; RN2.1@115.735,58.909 cw(c115.621,58.974) 115.621,58.842 ; RN2.1@116.154,58.842 115.621,58.842
A4: RN2.3 U3.A4 | length 45.4
  Top Layer w0.127: U3.A4@75.318,48.925 107.252,48.925 115.57,57.242 ; U3.A4@75.45,48.793 cw(c75.768,48.474) 75.768,48.925 cw(c75.768,49.375) U3.A4@75.45,49.056 ; RN2.3@115.748,57.157 ccw(c115.57,57.015) 115.57,57.242 ; RN2.3@115.748,57.328 cw(c115.57,57.47) 115.57,57.242 ; RN2.3@116.154,57.242 115.57,57.242
A5: RN3.1 U3.A5 | length 46.2
  Top Layer w0.127: U3.A5@75.318,47.925 108.878,47.925 115.595,54.642 ; U3.A5@75.45,47.793 cw(c75.768,47.474) 75.768,47.925 cw(c75.768,48.375) U3.A5@75.45,48.056 ; 115.179,54.226 cw(c115.854,53.551) RN3.1@115.854,54.505 ; 115.396,54.443 cw(c115.854,53.985) RN3.1@115.854,54.632 ; 115.613,54.659 cw(c115.854,54.418) RN3.1@115.854,54.759 ; RN3.1@115.742,54.565 ccw(c115.595,54.465) 115.595,54.642 ; RN3.1@115.742,54.719 cw(c115.595,54.819) 115.595,54.642 ; RN3.1@116.154,54.642 115.595,54.642
A6: RN3.3 U3.A6 | length 45.4
  Top Layer w0.127: U3.A6@75.318,46.925 109.529,46.925 115.646,53.042 ; U3.A6@75.45,46.793 cw(c75.768,46.474) 75.768,46.925 cw(c75.768,47.375) U3.A6@75.45,47.056 ; 115.266,52.662 cw(c115.854,52.074) RN3.3@115.854,52.905 ; 115.483,52.878 cw(c115.854,52.507) RN3.3@115.854,53.032 ; RN3.3@115.729,52.987 ccw(c115.646,52.952) 115.646,53.042 ; RN3.3@115.729,53.096 cw(c115.646,53.132) 115.646,53.042 ; RN3.3@116.154,53.042 115.646,53.042
A7: RN4.1 U3.A7 | length 44.7
  Top Layer w0.127: U3.A7@75.318,45.925 111.13,45.925 115.646,50.441 ; U3.A7@75.45,45.793 cw(c75.768,45.474) 75.768,45.925 cw(c75.768,46.375) U3.A7@75.45,46.056 ; 115.266,50.061 cw(c115.854,49.473) RN4.1@115.854,50.305 ; 115.483,50.278 cw(c115.854,49.907) RN4.1@115.854,50.432 ; RN4.1@115.729,50.387 ccw(c115.646,50.351) 115.646,50.441 ; RN4.1@115.729,50.496 cw(c115.646,50.531) 115.646,50.441 ; RN4.1@116.154,50.441 115.646,50.441
A8: RN4.3 U3.A8 | length 44.8
  Top Layer w0.127: U3.A8@75.318,44.925 111.704,44.925 115.621,48.841 ; U3.A8@75.45,44.793 cw(c75.768,44.474) 75.768,44.925 cw(c75.768,45.375) U3.A8@75.45,45.056 ; 115.223,48.443 cw(c115.854,47.812) RN4.3@115.854,48.705 ; 115.44,48.66 cw(c115.854,48.245) RN4.3@115.854,48.832 ; RN4.3@115.656,48.877 cw(c115.854,48.679) RN4.3@115.854,48.959 ; RN4.3@115.735,48.774 ccw(c115.621,48.71) 115.621,48.841 ; RN4.3@115.735,48.908 cw(c115.621,48.973) 115.621,48.841 ; RN4.3@116.154,48.841 115.621,48.841
A9: RN5.1 U3.A9 | length 44.2
  Top Layer w0.127: U3.A9@75.318,43.925 113.305,43.925 115.621,46.241 ; U3.A9@75.45,43.793 cw(c75.768,43.474) 75.768,43.925 cw(c75.768,44.375) U3.A9@75.45,44.056 ; 115.223,45.843 cw(c115.854,45.211) RN5.1@115.854,46.104 ; 115.44,46.059 cw(c115.854,45.645) RN5.1@115.854,46.231 ; RN5.1@115.656,46.276 cw(c115.854,46.078) RN5.1@115.854,46.358 ; RN5.1@115.735,46.174 ccw(c115.621,46.109) 115.621,46.241 ; RN5.1@115.735,46.308 cw(c115.621,46.372) 115.621,46.241 ; RN5.1@116.154,46.241 115.621,46.241
A10: RN5.3 U3.A10 | length 42.8
  Top Layer w0.127: U3.A10@75.318,42.925 113.752,42.925 115.468,44.641 RN5.3@116.154,44.641 ; U3.A10@75.45,42.793 cw(c75.768,42.474) 75.768,42.925 cw(c75.768,43.375) U3.A10@75.45,43.056 ; RN5.3@115.758,44.544 ccw(c115.525,44.311) 115.525,44.641 ccw(c115.525,44.97) RN5.3@115.758,44.737
A11: RN6.1 U3.A11 | length 42.4
  Top Layer w0.127: U3.A11@75.318,41.925 RN6.1@116.154,41.925 ; U3.A11@75.45,41.793 cw(c75.768,41.474) 75.768,41.925 cw(c75.768,42.375) U3.A11@75.45,42.056 ; 115.246,41.925 ccw(c115.246,42.649) RN6.1@115.758,42.137 ; 115.552,41.925 ccw(c115.552,42.342) RN6.1@115.847,42.047
A12: RN6.3 U3.A12 | length 43.4
  Top Layer w0.127: U3.A12@75.318,40.925 115.136,40.925 115.621,40.44 ; U3.A12@75.45,40.793 cw(c75.768,40.474) 75.768,40.925 cw(c75.768,41.375) U3.A12@75.45,41.056 ; 115.223,40.838 ccw(c115.854,41.47) RN6.3@115.854,40.577 ; 115.44,40.621 ccw(c115.854,41.036) RN6.3@115.854,40.45 ; RN6.3@115.656,40.405 ccw(c115.854,40.602) RN6.3@115.854,40.323 ; RN6.3@115.735,40.373 ccw(c115.621,40.309) 115.621,40.44 ; RN6.3@115.735,40.507 cw(c115.621,40.571) 115.621,40.44 ; RN6.3@116.154,40.44 115.621,40.44
A13: RN7.1 U3.A13 | length 43.8
  Top Layer w0.127: U3.A13@75.318,39.925 113.542,39.925 115.627,37.84 ; U3.A13@75.45,39.793 cw(c75.768,39.474) 75.768,39.925 cw(c75.768,40.375) U3.A13@75.45,40.056 ; 115.234,38.233 ccw(c115.854,38.854) RN7.1@115.854,37.976 ; 115.45,38.016 ccw(c115.854,38.42) RN7.1@115.854,37.849 ; RN7.1@115.734,37.776 ccw(c115.627,37.719) 115.627,37.84 ; RN7.1@115.734,37.904 cw(c115.627,37.96) 115.627,37.84 ; RN7.1@116.154,37.84 115.627,37.84
ASDO: U3.C1 U8.5 | length 33.8
  Top Layer w0.127: U3.C1@73.23,52.089 ccw(c73.151,52.236) 73.318,52.236 ; U3.C1@73.25,51.925 cw(c73.839,51.925) 73.423,52.341 ; U3.C1@73.318,51.925 73.318,52.236 ; U3.C1@73.377,51.925 cw(c74.273,51.925) 73.64,52.558 ; U3.C1@73.406,52.089 cw(c73.485,52.236) 73.318,52.236 ; U3.C1@73.504,51.925 cw(c74.707,51.925) 73.857,52.775 ; 93.428,62.592 cw(c93.822,62.197) U8.5@93.89,62.752 ; U8.5@93.875,62.625 ccw(c93.782,61.869) 93.243,62.408 ; U8.5@94.361,62.865 93.701,62.865 93.243,62.408 ; 73.318,52.236 74.447,53.365 91.719,53.365 93.243,54.889 93.243,62.408
B1: RN1.2 U3.B1 | length 48.5
  Top Layer w0.127: U3.B1@74.318,51.925 74.87,52.476 105.854,52.476 115.621,62.243 ; U3.B1@74.318,52.111 ccw(c74.318,52.561) 74.636,52.243 ccw(c74.955,51.925) U3.B1@74.504,51.925 ; 115.223,61.845 cw(c115.854,61.213) RN1.2@115.854,62.106 ; 115.44,62.062 cw(c115.854,61.647) RN1.2@115.854,62.233 ; RN1.2@115.656,62.278 cw(c115.854,62.08) RN1.2@115.854,62.36 ; RN1.2@115.735,62.176 ccw(c115.621,62.112) 115.621,62.243 ; RN1.2@115.735,62.31 cw(c115.621,62.374) 115.621,62.243 ; RN1.2@116.154,62.243 115.621,62.243
B3: RN1.4 U3.B3 | length 47.9
  Top Layer w0.127: U3.B3@74.318,49.925 74.812,50.419 105.461,50.419 115.685,60.643 RN1.4@116.154,60.643 ; U3.B3@74.318,50.111 ccw(c74.318,50.561) 74.636,50.243 ccw(c74.955,49.925) U3.B3@74.504,49.925 ; 115.332,60.29 cw(c115.854,59.767) RN1.4@115.854,60.506 ; 115.548,60.507 cw(c115.854,60.201) RN1.4@115.854,60.633
B4: RN2.2 U3.B4 | length 47.6
  Top Layer w0.127: U3.B4@74.318,48.925 74.796,49.403 107.007,49.403 115.646,58.042 ; U3.B4@74.318,49.111 ccw(c74.318,49.561) 74.636,49.243 ccw(c74.955,48.925) U3.B4@74.504,48.925 ; 115.266,57.662 cw(c115.854,57.074) RN2.2@115.854,57.906 ; 115.483,57.879 cw(c115.854,57.508) RN2.2@115.854,58.033 ; RN2.2@115.729,57.988 ccw(c115.646,57.952) 115.646,58.042 ; RN2.2@115.729,58.097 cw(c115.646,58.132) 115.646,58.042 ; RN2.2@116.154,58.042 115.646,58.042
B5: RN2.4 U3.B5 | length 47.3
  Top Layer w0.127: U3.B5@74.318,47.925 74.806,48.412 107.616,48.412 115.646,56.442 ; U3.B5@74.318,48.111 ccw(c74.318,48.561) 74.636,48.243 ccw(c74.955,47.925) U3.B5@74.504,47.925 ; 115.266,56.062 cw(c115.854,55.474) RN2.4@115.854,56.306 ; 115.483,56.279 cw(c115.854,55.908) RN2.4@115.854,56.433 ; RN2.4@115.729,56.388 ccw(c115.646,56.352) 115.646,56.442 ; RN2.4@115.729,56.497 cw(c115.646,56.532) 115.646,56.442 ; RN2.4@116.154,56.442 115.646,56.442
B6: RN3.2 U3.B6 | length 46.7
  Top Layer w0.127: U3.B6@74.318,46.925 74.841,47.447 109.252,47.447 115.646,53.842 ; U3.B6@74.318,47.111 ccw(c74.318,47.561) 74.636,47.243 ccw(c74.955,46.925) U3.B6@74.504,46.925 ; 115.266,53.462 cw(c115.854,52.874) RN3.2@115.854,53.705 ; 115.483,53.678 cw(c115.854,53.307) RN3.2@115.854,53.832 ; RN3.2@115.729,53.787 ccw(c115.646,53.752) 115.646,53.842 ; RN3.2@115.729,53.896 cw(c115.646,53.932) 115.646,53.842 ; RN3.2@116.154,53.842 115.646,53.842
B7: RN3.4 U3.B7 | length 46.4
  Top Layer w0.127: U3.B7@74.318,45.925 74.825,46.431 109.836,46.431 115.646,52.242 ; U3.B7@74.318,46.111 ccw(c74.318,46.561) 74.636,46.243 ccw(c74.955,45.925) U3.B7@74.504,45.925 ; 115.266,51.862 cw(c115.854,51.274) RN3.4@115.854,52.105 ; 115.483,52.078 cw(c115.854,51.707) RN3.4@115.854,52.232 ; RN3.4@115.729,52.187 ccw(c115.646,52.152) 115.646,52.242 ; RN3.4@115.729,52.296 cw(c115.646,52.332) 115.646,52.242 ; RN3.4@116.154,52.242 115.646,52.242
B8: RN4.2 U3.B8 | length 45.8
  Top Layer w0.127: U3.B8@74.318,44.925 74.834,45.441 111.446,45.441 115.646,49.641 ; U3.B8@74.318,45.111 ccw(c74.318,45.561) 74.636,45.243 ccw(c74.955,44.925) U3.B8@74.504,44.925 ; 115.266,49.261 cw(c115.854,48.673) RN4.2@115.854,49.505 ; 115.483,49.478 cw(c115.854,49.107) RN4.2@115.854,49.632 ; RN4.2@115.729,49.587 ccw(c115.646,49.551) 115.646,49.641 ; RN4.2@115.729,49.696 cw(c115.646,49.731) 115.646,49.641 ; RN4.2@116.154,49.641 115.646,49.641
B9: RN4.4 U3.B9 | length 44.7
  Top Layer w0.127: U3.B9@74.318,43.925 74.818,44.425 111.963,44.425 115.58,48.041 ; U3.B9@74.318,44.111 ccw(c74.318,44.561) 74.636,44.243 ccw(c74.955,43.925) U3.B9@74.504,43.925 ; 115.646,48.108 115.58,48.041 ; RN4.4@115.745,47.959 ccw(c115.58,47.834) 115.58,48.041 ; RN4.4@115.745,48.124 cw(c115.58,48.249) 115.58,48.041 ; RN4.4@116.154,48.041 115.58,48.041
B10: RN5.2 U3.B10 | length 45.5
  Top Layer w0.127: U3.B10@74.318,42.925 74.802,43.409 113.563,43.409 115.595,45.441 ; U3.B10@74.318,43.111 ccw(c74.318,43.561) 74.636,43.243 ccw(c74.955,42.925) U3.B10@74.504,42.925 ; 115.179,45.025 cw(c115.854,44.35) RN5.2@115.854,45.304 ; 115.396,45.241 cw(c115.854,44.783) RN5.2@115.854,45.431 ; 115.613,45.458 cw(c115.854,45.217) RN5.2@115.854,45.558 ; RN5.2@115.742,45.364 ccw(c115.595,45.264) 115.595,45.441 ; RN5.2@115.742,45.518 cw(c115.595,45.618) 115.595,45.441 ; RN5.2@116.154,45.441 115.595,45.441
B11: RN5.4 U3.B11 | length 43.9
  Top Layer w0.127: U3.B11@74.318,41.925 74.837,42.443 113.995,42.443 115.392,43.841 RN5.4@116.154,43.841 ; U3.B11@74.318,42.111 ccw(c74.318,42.561) 74.636,42.243 ccw(c74.955,41.925) U3.B11@74.504,41.925 ; RN5.4@115.758,43.744 ccw(c115.525,43.511) 115.525,43.841 ccw(c115.525,44.17) RN5.4@115.758,43.937
B12: RN6.2 U3.B12 | length 43.6
  Top Layer w0.127: U3.B12@74.318,40.925 74.795,41.402 115.484,41.402 ; U3.B12@74.318,41.111 ccw(c74.318,41.561) 74.636,41.243 ccw(c74.955,40.925) U3.B12@74.504,40.925 ; 115.603,41.283 ccw(c115.749,41.429) RN6.2@115.85,41.248 ; RN6.2@115.729,41.186 ccw(c115.646,41.15) 115.646,41.24 ; RN6.2@115.729,41.294 cw(c115.646,41.33) 115.646,41.24 ; RN6.2@115.788,41.359 cw(c115.664,41.582) 115.484,41.402 ; RN6.2@116.154,41.24 115.646,41.24 ; 115.484,41.402 115.646,41.24
B13: RN6.4 U3.B13 | length 43.8
  Top Layer w0.127: U3.B13@74.318,39.925 74.806,40.412 74.806,40.437 114.935,40.437 115.732,39.64 RN6.4@116.154,39.64 ; U3.B13@74.318,40.111 ccw(c74.318,40.561) 74.636,40.243 ccw(c74.955,39.925) U3.B13@74.504,39.925 ; 115.412,39.96 ccw(c115.854,40.402) RN6.4@115.854,39.777 ; 115.629,39.743 ccw(c115.854,39.969) RN6.4@115.854,39.65
BLUE: C40.1 J4.3 RN31.2 RN31.3 RN31.4 RN32.4 RN32.8 RN33.8 | length 51
  Top Layer w0.305: J4.3@105.029,76.302 cw(c105.029,74.585) 106.243,75.799 cw(c107.457,77.013) J4.3@105.74,77.013 ; J4.3@105.029,76.606 cw(c105.029,75.625) 105.723,76.319 cw(c106.417,77.013) J4.3@105.435,77.013 ; J4.3@105.029,77.013 107.569,74.473 116.738,74.473 118.262,72.949 118.262,69.291 117.069,68.097 117.069,65.884 ; RN31.4@106.007,67.132 106.007,67.806 106.324,68.123 113.081,68.123 ; RN31.3@106.807,67.132 106.807,68.046 ; RN31.2@107.607,67.132 107.607,68.085 ; RN32.4@110.02,67.132 110.02,68.034 ; RN32.8@112.42,65.274 112.42,65.456 113.081,66.116 113.081,68.123 ; RN32.8@112.42,65.622 ccw(c112.42,66.023) 112.704,65.739 ; RN33.8@116.481,65.342 ccw(c116.482,65.451) RN33.8@116.559,65.374 ; RN33.8@116.484,65.3 117.069,65.884 ; RN33.8@116.485,65.647 ccw(c116.497,66.455) 117.069,65.884 ; 117.043,68.123 113.081,68.123
  Bottom Layer w0.508: J4.3@104.598,76.582 cw(c103.557,75.541) 105.029,75.541 cw(c106.501,75.541) J4.3@105.46,76.582 ; C40.1@105.029,74.676 J4.3@105.029,77.013
BUZZER: CB1.1 U3.C11 | length 23.4
  Top Layer w0.254: U3.C11@73.318,41.802 cw(c73.318,41.505) 73.528,41.715 cw(c73.738,41.925) U3.C11@73.441,41.925 ; U3.C11@73.318,41.925 v1(73.818,41.425) ; v1@73.691,41.425 ccw(c73.384,41.425) 73.601,41.641 ccw(c73.818,41.858) v1@73.818,41.552
  Mid-Layer 1 w0.127: v1(73.818,41.425) 80.013,41.425 CB1.1@83.947,37.49 ; v1@73.953,41.29 cw(c74.278,40.965) 74.278,41.425 cw(c74.278,41.884) v1@73.953,41.559 ; CB1.1@83.147,37.49 ccw(c81.215,37.49) 82.581,38.856 ccw(c83.947,40.222) CB1.1@83.947,38.291 ; CB1.1@83.274,37.49 ccw(c81.649,37.49) 82.798,38.639 ccw(c83.947,39.789) CB1.1@83.947,38.163 ; CB1.1@83.401,37.49 ccw(c82.082,37.49) 83.015,38.423 ccw(c83.947,39.355) CB1.1@83.947,38.036 ; CB1.1@83.528,37.49 ccw(c82.516,37.49) 83.232,38.206 ccw(c83.947,38.921) CB1.1@83.947,37.91
C2: RN1.1 U3.C2 | length 50.6
  Top Layer w0.127: U3.C2@73.318,50.925 73.787,51.394 73.787,52.121 74.625,52.959 105.537,52.959 115.621,63.043 ; U3.C2@73.318,51.111 ccw(c73.318,51.561) 73.636,51.243 ccw(c73.955,50.925) U3.C2@73.504,50.925 ; 115.223,62.645 cw(c115.854,62.013) RN1.1@115.854,62.906 ; 115.44,62.862 cw(c115.854,62.447) RN1.1@115.854,63.033 ; RN1.1@115.656,63.078 cw(c115.854,62.88) RN1.1@115.854,63.16 ; RN1.1@115.735,62.976 ccw(c115.621,62.912) 115.621,63.043 ; RN1.1@115.735,63.11 cw(c115.621,63.174) 115.621,63.043 ; RN1.1@116.154,63.043 115.621,63.043
C6: RN7.4 U3.C6 | length 52.6
  Top Layer w0.127: v1(115.196,35.44) RN7.4@116.154,35.44 ; v1@115.33,35.305 cw(c115.656,34.98) 115.656,35.44 cw(c115.656,35.9) v1@115.33,35.574 ; RN7.4@115.758,35.343 ccw(c115.525,35.11) 115.525,35.44 ccw(c115.525,35.769) RN7.4@115.758,35.536
  Top Layer w0.254: U3.C6@73.318,46.925 v1(73.818,47.425) ; U3.C6@73.318,47.048 ccw(c73.318,47.345) 73.528,47.135 ccw(c73.738,46.925) U3.C6@73.441,46.925 ; v1@73.691,47.425 cw(c73.384,47.425) 73.601,47.208 cw(c73.818,46.991) v1@73.818,47.298
  Mid-Layer 1 w0.127: v1(73.818,47.425) 95.171,47.425 108.28,34.315 114.071,34.315 v1(115.196,35.44) ; v1@73.953,47.29 cw(c74.278,46.965) 74.278,47.425 cw(c74.278,47.885) v1@73.953,47.559 ; v1@115.005,35.44 cw(c114.545,35.44) 114.87,35.114 cw(c115.196,34.789) v1@115.196,35.249
C8: RN8.3 U3.C8 | length 52.2
  Top Layer w0.127: v1(115.214,32.029) RN8.3@116.144,32.029 ; v1@115.349,31.895 cw(c115.674,31.569) 115.674,32.029 cw(c115.674,32.489) v1@115.349,32.164 ; 115.501,32.029 ccw(c115.501,32.392) RN8.3@115.758,32.136 ; 115.548,32.029 cw(c115.548,31.733) RN8.3@115.758,31.943
  Top Layer w0.254: U3.C8@73.318,44.925 v1(73.818,45.425) ; U3.C8@73.318,45.048 ccw(c73.318,45.345) 73.528,45.135 ccw(c73.738,44.925) U3.C8@73.441,44.925 ; v1@73.691,45.425 cw(c73.384,45.425) 73.601,45.208 cw(c73.818,44.991) v1@73.818,45.298
  Mid-Layer 1 w0.127: v1(73.818,45.425) 90.542,45.425 103.937,32.029 v1(115.214,32.029) ; v1@73.953,45.29 cw(c74.278,44.965) 74.278,45.425 cw(c74.278,45.885) v1@73.953,45.559 ; v1@115.08,31.895 ccw(c114.754,31.569) 114.754,32.029 ccw(c114.754,32.489) v1@115.08,32.164
CLK: R3.1 U3.E1 | length 7.5
  Top Layer w0.127: U3.E1@71.186,52.056 ccw(c70.868,52.375) 71.318,52.375 ccw(c71.768,52.375) U3.E1@71.45,52.056 ; U3.E1@71.318,51.925 71.318,53.055 73.787,55.524 R3.1@73.812,55.524 ; 73.184,54.921 cw(c73.812,54.292) R3.1@73.812,55.181 ; 73.245,54.982 ccw(c72.703,55.524) R3.1@73.469,55.524 ; 73.4,55.138 cw(c73.812,54.726) R3.1@73.812,55.308 ; R3.1@73.462,55.199 ccw(c73.137,55.524) R3.1@73.596,55.524
CONF_DONE: R11.2 R13.1 U3.H14 | length 35
  Top Layer w0.127: v1(84.379,32.309) R11.2@86.639,32.309 R13.1@88.163,32.309 ; v1@84.514,32.174 cw(c84.839,31.849) 84.839,32.309 cw(c84.839,32.769) v1@84.514,32.444 ; R11.2@86.397,32.066 ccw(c85.812,31.481) 85.812,32.309 ccw(c85.812,33.137) R11.2@86.397,32.551 ; R11.2@86.487,32.156 ccw(c86.118,31.788) 86.118,32.309 ccw(c86.118,32.83) R11.2@86.487,32.461 ; R11.2@86.792,32.156 cw(c87.161,31.788) 87.161,32.309 cw(c87.161,32.83) R11.2@86.792,32.461 ; R11.2@86.882,32.066 cw(c87.467,31.481) 87.467,32.309 cw(c87.467,33.137) R11.2@86.882,32.551 ; R13.1@87.921,32.066 ccw(c87.336,31.481) 87.336,32.309 ccw(c87.336,33.137) R13.1@87.921,32.551 ; R13.1@88.011,32.156 ccw(c87.642,31.788) 87.642,32.309 ccw(c87.642,32.83) R13.1@88.011,32.461
  Top Layer w0.254: U3.H14@68.318,38.802 cw(c68.318,38.505) 68.528,38.715 cw(c68.738,38.925) U3.H14@68.441,38.925 ; U3.H14@68.318,38.925 v1(68.818,38.425) ; v1@68.691,38.425 ccw(c68.384,38.425) 68.601,38.641 ccw(c68.818,38.858) v1@68.818,38.552
  Mid-Layer 1 w0.127: v1@68.818,38.234 cw(c68.818,38.029) 68.963,38.174 ; v1(68.818,38.425) 68.818,38.319 69.469,37.668 69.469,35.382 v1(72.568,32.283) ; v1@68.882,38.425 ccw(c69.289,38.425) 69.001,38.136 ; v1@69.009,38.425 ccw(c69.723,38.425) 69.218,37.919 ; v1@72.377,32.283 ccw(c71.917,32.283) 72.243,32.609 ccw(c72.568,32.934) v1@72.568,32.474
  Bottom Layer w0.127: v1@72.703,32.149 cw(c73.089,31.762) 73.089,32.309 ; v1@72.703,32.418 ccw(c72.966,32.682) 72.966,32.309 ; v1@72.771,32.309 v1(84.379,32.309) ; v1@84.244,32.174 ccw(c83.919,31.849) 83.919,32.309 ccw(c83.919,32.769) v1@84.244,32.444
D1V2: C5.1 C6.1 C7.1 C8.1 C9.1 C48.1 EC4.1 P4.2 U3.D13 U3.G6 U3.G7 U3.G8 U3.G9 U3.G10 U3.H6 U3.H11 U3.K7 U3.N4 U5.2 U5.4 | length 39.2
  Top Layer w0.5: v1(62.818,49.425) U3.N4@63.318,48.925 ; v1(65.818,46.425) U3.K7@66.318,45.925 ; U3.H11@68.318,41.925 v1(68.818,41.425) ; U3.H6@68.318,46.925 v1(68.818,47.425) ; U3.G10@69.318,42.925 v1(69.818,42.425) ; U3.G9@69.318,43.925 v1(69.818,43.425) ; U3.G8@69.318,44.925 v1(69.818,45.425) ; U3.G7@69.318,45.925 v1(69.818,46.425) ; U3.G6@69.318,46.925 v1(69.818,47.425) ; U3.D13@72.318,39.925 v1(72.818,39.425)
  Top Layer w0.508: EC4.1@59.741,67.639 cw(c59.741,63.404) 62.735,66.399 ; EC4.1@59.741,68.147 cw(c59.741,65.139) 61.868,67.266 ; EC4.1@59.741,68.655 cw(c59.741,66.873) 61.001,68.133 ; EC4.1@59.741,68.885 60.249,68.885 P4.2@65.126,64.008 ; P4.2@64.63,64.008 ccw(c63.432,64.008) 64.279,64.855 ccw(c65.126,65.701) P4.2@65.126,64.504
  Bottom Layer w0.203: C6.1@65.57,44.425 ccw(c65.049,44.425) 65.417,44.793 ccw(c65.786,45.162) C6.1@65.786,44.64 ; v1@65.666,46.425 cw(c65.298,46.425) 65.558,46.164 cw(c65.818,45.904) v1@65.818,46.272 ; C6.1@65.786,44.425 65.303,44.907 65.303,45.91 v1(65.818,46.425) ; C5.1@67.498,41.11 cw(c66.733,40.345) 67.815,40.345 cw(c68.898,40.345) C5.1@68.132,41.11 ; C5.1@67.642,41.254 cw(c67.223,40.835) 67.815,40.835 cw(c68.407,40.835) C5.1@67.989,41.254 ; C8.1@67.691,40.31 ccw(c67.39,40.611) 67.815,40.611 ; C8.1@67.815,40.262 C5.1@67.815,41.427 v1@68.815,41.427 ; 67.815,40.747 ccw(c68.433,40.747) C8.1@67.996,40.31 ; C9.1@67.869,47.498 v1@68.745,47.498 ; C9.1@68.021,47.345 cw(c68.39,46.977) 68.39,47.498 cw(c68.39,48.019) C9.1@68.021,47.651 ; 68.273,47.498 cw(c68.273,46.88) v1@68.71,47.317 ; C5.1@68.31,41.167 cw(c68.815,40.808) v1@68.815,41.427 ; C5.1@68.31,41.688 ccw(c68.815,42.047) v1@68.815,41.427 ; C5.1@68.443,41.427 cw(c68.443,41.05) v1@68.71,41.317 ; C5.1@68.457,41.427 ccw(c68.457,41.786) v1@68.71,41.532 ; v1@68.679,41.361 ccw(c68.431,41.248) 68.502,41.511 ccw(c68.574,41.782) v1@68.732,41.55 ; v1@68.68,41.488 cw(c68.444,41.596) 68.511,41.346 cw(c68.575,41.107) v1@68.725,41.303
  Bottom Layer w0.508: 55.778,69.621 C48.1@55.778,71.12
  other v1: 57.125,67.488 58.09,67.488 58.09,68.275 57.099,68.326 58.064,69.24 57.099,69.266 58.064,70.104 57.125,70.129